# Altium PCB motherboard.pcbdoc
Units mil, origin at the board's own origin, x right, y up, seen from the top; angles counter-clockwise.
Board outline 10976.97 x 1870.5 mil, 2 copper layers (Top Layer, Bottom Layer); 62 components, 56 nets, 228 pads, 95 vias.
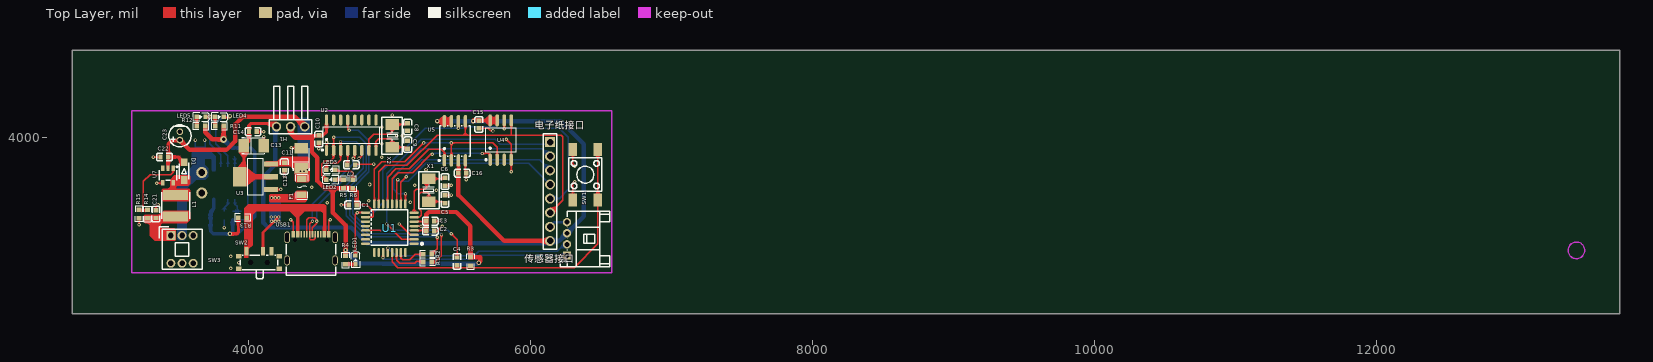
[diagram p0: Top Layer view]
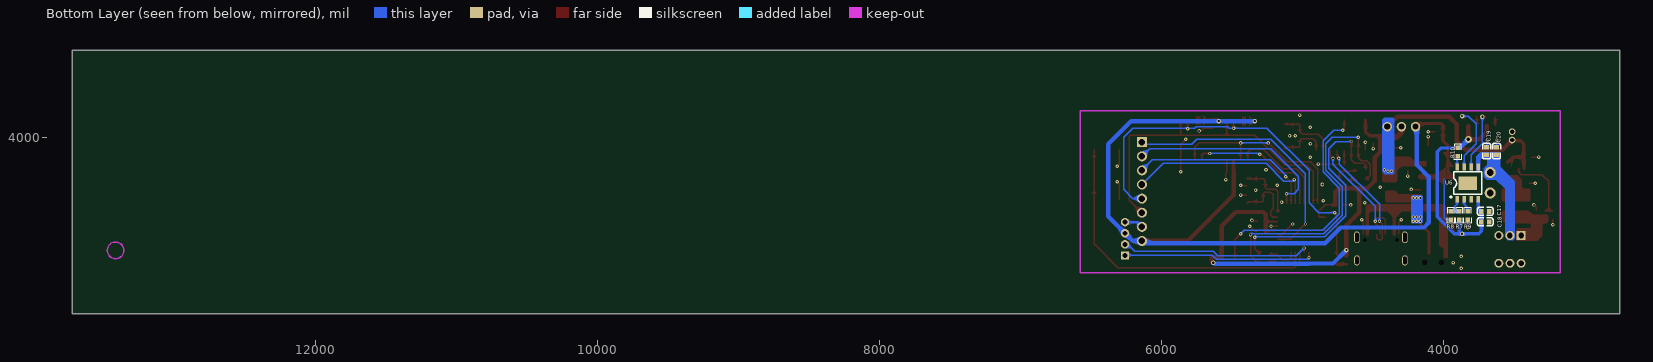
[diagram p1: Bottom Layer view, seen from below]

## Layer stack, top to bottom
Top Layer: signal copper (thickness not stored)
Dielectric: dielectric 12.6, FR-4, Dk 4.8
Bottom Layer: signal copper (thickness not stored)

## Board outline
13726.97,2750 2750,2750 2750,4620.5 13726.97,4620.5

## Components (designator, comment, footprint, x,y, rotation, side; value= is the part's Value field where it differs from the comment)
C1 "100nF" C0603 4740,3521.9 r0 top
C2 "100nF" C0603 5290,3336.9 r180 top
C3 "100nF" C0603 5290,3406.9 r180 top
C4 "100nF" C0603 5480,3121.9 r90 top
C5 "22PF" C0603 5395,3561.9 r90 top
C6 "22PF" C0603 5395,3686.9 r270 top
C7 "100nF" C0603 4730,3806.9 r180 top
C8 "22PF" C0603 5130,4074.34 r270 top
C9 "22PF" C0603 5130,3949.34 r90 top
C10 "100nF" C0603 4500,3989.46 r90 top
C11 "10uF" CAP-SMD_L3.5-W2.8-FD 4375,3851.9 r90 top
C12 "100nF" C0603 4255,3794.46 r90 top
C13 "10uF" CAP-SMD_L3.5-W2.8-FD 4040,3941.9 r0 top
C14 "100nF" C0603 4032.56,4041.9 r180 top
C15 "100nF" C0603 5635,4091.9 r270 top
C16 "100nF" C0603 5517.44,3746.9 r0 top
C17 "10UF" C0603 3705,3476.9 r180 bottom
C18 "1UF" C0603 3705,3401.9 r180 bottom
C19 "10UF" C0603 3695,3904.34 r90 bottom
C20 "1UF" C0603 3625,3904.34 r90 bottom
C21 "10UF" C0603 3345,3456.9 r90 top
C22 "1UF" C0603 3405,3861.9 r180 top
C23 "47uF" CAP-TH_BD4.0-P1.50-D0.8-FD 3515,4011.9 r90 top
D1 "1N4007W" SOD-123FL_L3.0-W1.8-LS3.7-RD 3545,3761.9 r270 top
F1 "500mA/24V" F1206 4380,3651.9 r90 top
H1 "2.54-1*3P正弯针" HDR-TH_3P-P2.54-H-M-BW7.2-P 4300,4076.9 r180 top
L1 "22uH" IND-SMD_L5.0-W5.0-P3.60_SMNR5040 3485,3516.9 r90 top
LED1 "D-060306R1/SS2/L" LED0603-RD 4760,3131.9 r270 top
LED2 "D-060306R1/SS2/L" LED0603-RD 4583.52,3701.76 r0 top
LED3 "D-060306R1/SS2/L" LED0603-RD 4585,3771.9 r0 top
LED4 "D-060306R1/SS2/L" LED0603-RD 3795,4146.9 r180 top
LED5 "D-060306R1/SS2/L" LED0603-RD 3665,4146.9 r180 top
R1 "1k" R0603 5270,3116.9 r180 top
R2 "1k" R0603 5270,3171.9 r180 top
R3 "10K" R0603 5575,3121.9 r270 top
R4 "10K" R0603 4690,3131.56 r270 top
R5 "10K" R0603 4675,3671.9 r90 top
R6 "10K" R0603 4740,3671.56 r90 top
R7 "NC" R0603 3890,3446.9 r90 bottom
R8 "NC" R0603 3950,3446.9 r90 bottom
R9 "2K" R0603 3830,3447.24 r90 bottom
R10 "0.5R" R0603 3900,3896.56 r90 bottom
R11 "10K" R0603 3795,4081.9 r0 top
R12 "10K" R0603 3665,4081.9 r0 top
R13 "0R" R0603 3959.66,3431.9 r180 top
R14 "10K" R0603 3285,3456.9 r270 top
R15 "NC" R0603 3225,3456.9 r90 top
SW1 "Key_SMD_6x6x6.5" SW-SMD_4P-L6.0-W6.0-P4.50-LS9.0-2 6390,3736.9 r90 top
SW2 "SSSS811101" SW-SMD_SSSS811101 4075,3131.9 r0 top
SW3 "XKB7070-Z" SW-TH_6P-L7.0-W7.0-P2.00 3530,3206.9 r90 top
U1 "EGA328p" QFP-32 5010,3356.9 r180 top
U2 "CH340G" SOIC-16_L9.9-W3.9-P1.27-LS6.0-BL 4730,4016.9 r0 top
U3 "REG1117A" SOT-223-4_L6.5-W3.5-P2.30-LS7.0-BR 4050,3721.9 r0 top
U4 "GT30L32S4W" SOP-8_L5.3-W5.3-P1.27-LS8.0-BL 5790,3981.9 r0 top
U5 "W25Q16JVSNIQ TR" SOIC-8_L5.2-W5.2-P1.27-LS7.9-BL 5465,3976.9 r0 top
U6 "TP4056" ESOP-8_L4.9-W3.9-P1.27-LS6.0-BL-EP 3830,3676.9 r180 bottom
U7 "ME2188C50M5G" SOT-23-5_L3.0-W1.7-P0.95-LS2.8-BR 3430,3731.9 r90 top
USB1 "TYPE-C16PIN" USB-C-SMD_TYPE-C16PIN 4445,3221.9 r0 top
X1 "RG16000494" CRYSTAL-SMD_L5.0-W3.2 5280,3626.9 r270 top
X2 "RG12000501" CRYSTAL-SMD_L5.0-W3.2 5020,4011.9 r90 top
传感器接口 "HX20018-4WA" CONN-TH_4P-P2.00_HX20018-4WA 6260,3281.9 r90 top
电子纸接口 "2.54-1*8P母环保" HDR-TH_8P-P2.54-V-F-1 6140,3616.9 r270 top

## Footprints (in the part's own frame and the unit in brackets; to place one, negate y for a bottom-side part, rotate by r counter-clockwise, add the part's x,y. Pads: shape width x height; smd on the part's side, far side on the other; paste and mask are expansions set on the pad)
C0603 [mm]
  rect 0.8x0.9 smd: 1(-0.7,0) 2(0.7,0)
  silkscreen extent -1.41,-0.71 1.39,0.72
CAP-SMD_L3.5-W2.8-FD [mil]
  rect 74.8x93.5 smd: 1(-70.8,0) 2(70.8,0)
  silkscreen extent -87,-61 72,61
CAP-TH_BD4.0-P1.50-D0.8-FD [mm]
  round 1.2 hole 0.8: 1(-0.75,0) 2(0.75,0)
  silkscreen extent -1.98,-2 2.06,2
CONN-TH_4P-P2.00_HX20018-4WA [mil]
  rect 59.1x59.1 hole 35.4: 1(-118.1,0)
  round 59.1 hole 35.4: 2(-39.4,0) 3(39.4,0) 4(118.1,0)
  silkscreen extent -197,-303 197,50
CRYSTAL-SMD_L5.0-W3.2 [mil]
  rect 74.8x94.5 smd: 1(-80.7,0) 2(80.7,0)
  silkscreen extent -131,-73 131,73
ESOP-8_L4.9-W3.9-P1.27-LS6.0-BL-EP [mm]
  rect 0.6x1.2 smd: 1(-1.905,-2.908) 2(-0.635,-2.908) 3(0.635,-2.908) 4(1.905,-2.908) 5(1.905,2.908) 6(0.635,2.908) 7(-0.635,2.908) 8(-1.905,2.908)
  rect 3.3x2.4 smd: 9(0,0)
  silkscreen extent -3.2,-2.67 2.55,2.05
F1206 [mil]
  rect 46.9x68 smd: 1(-56.9,0) 2(56.9,0)
  silkscreen extent -89,-43 89,43
HDR-TH_3P-P2.54-H-M-BW7.2-P [mil]
  round 66.9 hole 43.3: 1(-100,0) 2(0,0) 3(100,0)
  silkscreen extent -150,-286 150,50
HDR-TH_8P-P2.54-V-F-1 [mil]
  rect 70.9x70.9 hole 47.2: 1(-350,0)
  round 70.9 hole 47.2: 2(-250,0) 3(-150,0) 4(-50,0) 5(50,0) 6(150,0) 7(250,0) 8(350,0)
  silkscreen extent -410,-48 410,48
IND-SMD_L5.0-W5.0-P3.60_SMNR5040 [mil]
  rect 70.9x177.2 smd: 1(-76.8,0) 2(76.8,0)
  silkscreen extent -94,-98 94,98
LED0603-RD [mm]
  rect 0.8x0.8 smd: 1(-0.799,-0.003) 2(0.799,0.003)
  silkscreen extent -1.49,-0.75 1.39,0.76
QFP-32 [mil]
  oval 65x17.7 smd: 1(-166.25,110.4) 2(-166.25,78.9) 3(-166.25,47.4) 4(-166.25,15.9) 5(-166.25,-15.6) 6(-166.25,-47.1) 7(-166.25,-78.6) 8(-166.25,-110.1) 17(178.75,-110.1) 18(178.75,-78.6) 19(178.75,-47.1) 20(178.75,-15.6) 21(178.75,15.9) 22(178.75,47.4) 23(178.75,78.9) 24(178.75,110.4)
  oval 17.7x65 smd: 9(-103.95,-171.9) 10(-72.45,-171.9) 11(-40.95,-171.9) 12(-9.45,-171.9) 13(22.05,-171.9) 14(53.55,-171.9) 15(85.05,-171.9) 16(116.55,-171.9) 25(116.55,172.1) 26(85.05,172.1) 27(53.55,172.1) 28(22.05,172.1) 29(-9.45,172.1) 30(-40.95,172.1) 31(-72.45,172.1) 32(-103.95,172.1)
  silkscreen extent -234,-130 139,123
R0603 [mil]
  rect 31.75x34.02 smd: 1(-29.66,0) 2(29.66,0)
  silkscreen extent -55,-26 55,26
SOD-123FL_L3.0-W1.8-LS3.7-RD [mil]
  rect 55.1x48 smd: 1(-63,0) 2(63,0)
  silkscreen extent -59,-34 59,34
SOIC-8_L5.2-W5.2-P1.27-LS7.9-BL [mm]
  oval 0.63x2.25 smd: 1(-1.905,-3.53) 2(-0.635,-3.53) 3(0.635,-3.53) 4(1.905,-3.53) 5(1.905,3.53) 6(0.635,3.53) 7(-0.635,3.53) 8(-1.905,3.53)
  silkscreen extent -2.99,-3.69 2.74,2.75
SOIC-16_L9.9-W3.9-P1.27-LS6.0-BL [mil]
  oval 23.7x77.6 smd: 1(-175,-107.7) 2(-125,-107.7) 3(-75,-107.7) 4(-25,-107.7) 5(25,-107.7) 6(75,-107.7) 7(125,-107.7) 8(175,-107.7) 9(175,107.7) 10(125,107.7) 11(75,107.7) 12(25,107.7) 13(-25,107.7) 14(-75,107.7) 15(-125,107.7) 16(-175,107.7)
  silkscreen extent -211,-111 198,60
SOP-8_L5.3-W5.3-P1.27-LS8.0-BL [mil]
  oval 23.98x86.79 smd: 1(-75,-139.46) 2(-25,-139.46) 3(25,-139.46) 4(75,-139.46) 5(75,139.46) 6(25,139.46) 7(-25,139.46) 8(-75,139.46)
  silkscreen extent -111,-145 106,87
SOT-23-5_L3.0-W1.7-P0.95-LS2.8-BR [mm]
  rect 1x0.6 smd: 1(1.3,-0.95) 2(1.3,0) 3(1.3,0.95) 4(-1.3,0.95) 5(-1.3,-0.95)
  silkscreen extent -0.9,-1.78 1.65,1.55
SOT-223-4_L6.5-W3.5-P2.30-LS7.0-BR [mm]
  rect 2.47x0.98 smd: 1(2.835,-2.3) 2(2.835,0) 3(2.835,2.3)
  rect 2.47x3.6 smd: 4(-2.835,0)
  silkscreen extent -1.37,-3.33 1.37,3.33
SW-SMD_4P-L6.0-W6.0-P4.50-LS9.0-2 [mm]
  rect 2.3x1.5 smd: 1(-4.55,2.25) 2(4.55,2.25) 3(-4.55,-2.25) 4(4.55,-2.25)
  silkscreen extent -3,-3 3,3
SW-SMD_SSSS811101 [mil]
  rect 27.6x59.1 smd: 1(-88.6,61) 2(29.5,61) 3(88.6,61)
  rect 39.4x31.5 smd: 4(-143.7,25.6) 5(143.7,25.6) 6(143.7,-61) 7(-143.7,-61)
  Multi-Layer board cut-out: -41.3,-17.7 -43.05,-10.02 -47.96,-3.86 -55.06,-0.44 -62.94,-0.44 -70.04,-3.86 -74.95,-10.02 -76.7,-17.7 -76.7,-17.7 -74.95,-25.38 -70.04,-31.54 -62.94,-34.96 -55.06,-34.96 -47.96,-31.54 -43.05,-25.38 -41.3,-17.7
  Multi-Layer board cut-out: 76.8,-17.7 75.05,-10.02 70.14,-3.86 63.04,-0.44 55.16,-0.44 48.06,-3.86 43.15,-10.02 41.4,-17.7 41.4,-17.7 43.15,-25.38 48.06,-31.54 55.16,-34.96 63.04,-34.96 70.14,-31.54 75.05,-25.38 76.8,-17.7
  silkscreen extent -134,-132 134,34
SW-TH_6P-L7.0-W7.0-P2.00 [mm]
  rect 1.6x1.6 hole 1: 1(2.5,2)
  round 1.6 hole 1: 2(2.5,0) 3(2.5,-2) 4(-2.5,2) 5(-2.5,0) 6(-2.5,-2)
  silkscreen extent -3.6,-3.6 4.06,4.06
USB-C-SMD_TYPE-C16PIN [mil]
  oval 39.4x82.7 hole 23.6 slot 66.9 at 90 deg: 1(-170.1,70.4) 2(170.1,70.4)
  oval 39.4x70.9 hole 23.6 slot 55.1 at 90 deg: 3(-170.1,-93) 4(170.1,-93)
  rect 23.6x45.3 smd: A1B12(-126,93) A4B9(-94.5,93) B1A12(126,93) B4A9(94.5,93)
  rect 11.8x45.3 smd: A5(-49.2,93) A6(-9.8,93) A7(9.8,93) A8(-68.9,93) B5(68.9,93) B6(29.5,93) B7(-29.5,93) B8(49.2,93)
  Multi-Layer board cut-out: 126.6,50.7 125.33,56.25 121.78,60.71 116.65,63.18 110.95,63.18 105.82,60.71 102.27,56.25 101,50.7 101,50.7 102.27,45.15 105.82,40.69 110.95,38.22 116.65,38.22 121.78,40.69 125.33,45.15 126.6,50.7
  Multi-Layer board cut-out: -101,50.7 -102.27,56.25 -105.82,60.71 -110.95,63.18 -116.65,63.18 -121.78,60.71 -125.33,56.25 -126.6,50.7 -126.6,50.7 -125.33,45.15 -121.78,40.69 -116.65,38.22 -110.95,38.22 -105.82,40.69 -102.27,45.15 -101,50.7
  silkscreen extent -175,-197 175,20

## Free pads (board coordinates)
  round 78.74 hole 47.24: 1(3670,3606.9) 2(3670,3751.9)

## Via types
v1: diameter 25, hole 12, Top Layer to Bottom Layer, 45 vias
v2: diameter 24.02, hole 12.01, Top Layer to Bottom Layer, 42 vias
v3: diameter 32, hole 16, Top Layer to Bottom Layer, 7 vias
v4: diameter 50, hole 25, Top Layer to Bottom Layer, 1 vias

## Nets (pads, with @x,y where several pads share a name; then routed paths per layer and width w, separated by ;. In a path a pad name is that pad's centre, name@x,y a point inside that pad or via, vN(x,y) a via of type N, cw(c..) or ccw(c..) an arc to the next point about the centre after c; other vN are vias at no path point)
3.3V: C13.1 C14.2 C15.1 C16.1 H1.3 U3.2 U3.4 U4.7 U4.8 U5.3 U5.7 U5.8 传感器接口.3 电子纸接口.8 | length 6907.7
  Top Layer w19.68: v3(5340,4116.9) 5341.02,4115.88 U5.8 U5.7 ; C16.1 5490,3747.02 U5.3 ; C15.1 5636.9,4121.36 U4.8 U4.7
  Top Layer w23.62: U3.4 3969.2,3752.71 C13.1 4005,3977.7 C14.2 4005,4086.9 4017.44,4099.34 4177.56,4099.34 H1.3
  Top Layer w31.5: C16.1@5490,3747.02 5490,3591.9 5815,3266.9 电子纸接口.8 ; v3(5595,4116.9) 5599.46,4121.36 C15.1@5636.9,4121.36
  Top Layer w39.37: U3.4 U3.2
  Bottom Layer w31.5: H1.3 4190,4066.9 4190,3805.65 4105,3720.65 4105,3396.9 4140,3361.9 4729.82,3361.9 4839.82,3251.9 6149.85,3251.9 电子纸接口.8@6164.85,3266.9 ; v3(5340,4116.9) v3(5595,4116.9) 6215,4116.9 6380,3951.9 6380,3441.3 传感器接口.3 6205.6,3266.9 电子纸接口.8@6164.85,3266.9 ; 电子纸接口.8 电子纸接口.8@6164.85,3266.9
$1N2861: LED1.2 R4.2 | length 70.7
  Top Layer w19.68: R4.2 4758.66,3101.9 LED1.2
$1N3574: C7.2 U2.4 | length 103.4
  Top Layer w10: C7.2 4705,3809.46 U2.4
$1N4007: C8.1 U2.7 X2.2 | length 430
  Top Layer w10: U2.7 4855,3986.9 4890,4021.9 5000,4021.9 5020,4041.9 X2.2 5120.7,4092.6 C8.1
$1N4032: C9.1 U2.8 X2.1 | length 354.7
  Top Layer w10: U2.8 4905,3971.9 4925,3991.9 5010,3991.9 5020,3981.9 X2.1 5120.58,3931.2 C9.1
$1N4612: LED2.2 R5.2 | length 60.3
  Top Layer w10: LED2.2 R5.2@4675.34,3701.9
$1N4844: LED3.2 R6.2 | length 182.5
  Top Layer w10: LED3.2 4626.61,3761.9 4730,3761.9 4740,3751.9 R6.2
$1N6641: F1.1 SW2.2 | length 535.6
  Top Layer w19.68: SW2.2@4104.5,3177.9 4104.5,3326.4 v2(4215,3436.9) ; v2(4165,3571.9) v2(4190,3571.9) v2(4215,3571.9) 4341.9,3571.9 F1.1@4380,3610
  other v2: 4165,3406.9 4190,3406.9 4215,3406.9 4162.77,3436.9 4190,3436.9
$1N15331: R9.2 U6.2 | length 95.9
  Bottom Layer w10: R9.2 3830,3501.9 3855,3526.9 U6.2
$1N16926: R10.1 U6.8 | length 77.6
  Bottom Layer w10: R10.1 3905,3861.9 U6.8
$1N17723: LED4.2 R11.1 | length 65.6
  Top Layer w10: LED4.2 3765.34,4144.95 R11.1
$1N17812: LED5.2 R12.1 | length 65.6
  Top Layer w10: LED5.2 3635.34,4144.95 R12.1
$1N17901: LED4.1 U6.7 | length 492.6
  Top Layer w10: 3845,4141.9 3860,4141.9 v3(3870,4151.9)
  Bottom Layer w10: U6.7 3855,3871.9 3770,3956.9 3770,4096.9 3825,4151.9 v3(3870,4151.9)
$1N17990: LED5.1 U6.6 | length 417.2
  Top Layer w10: LED5.1 3724.86,4147.03 v3(3725,4146.9)
  Bottom Layer w10: v3(3725,4146.9) 3725,3956.9 3805,3876.9 U6.6
$1N22837: C21.1 L1.1 R14.2 SW3.1 | length 419.7
  Top Layer w31.5: R14.2@3289.66,3426.9 3342.56,3426.9 C21.1 ; SW3.1 3371.59,3305.32 3345,3331.9 C21.1 ; L1.1@3485,3450.1 3464.24,3429.34 C21.1
$1N23850: D1.2 L1.2 U7.5 | length 85.1
  Top Layer w23.62: U7.5 3526.82,3680.72 D1.2
+5V: C11.1 C12.2 C22.1 C23.1 D1.1 F1.2 H1.1 U3.3 U7.2 | length 1818.1
  Top Layer w19.68: U3.3@4156.61,3817.45 4371.35,3817.45 4370,3816.1 v2(4370,3761.9) 4370,3733.8 F1.2@4380,3723.8
  Top Layer w23.62: U7.2 3430,3859.34 C22.1 ; C23.1 3509.44,3976.81 3454.91,3976.81 3432.56,3954.46 C22.1 ; D1.1 3508,3861.9 C22.1
  Top Layer w31.5: C23.1 3585.47,3911.9 3845,3911.9 3906.05,3972.95 3906.05,4092.95 3960,4146.9 4330,4146.9 H1.1
  other v2: 4395,3761.9 4420,3771.9
AD0: U1.23
AD1: U1.24
AD2: U1.25
AD3: U1.26
AD6: U1.19
AD7: U1.22
AREF: U1.20
BAT: C19.1 C20.1 pad.2 SW3.2 U6.5 | length 861.6
  Bottom Layer w23.62: C20.1 3658.02,3876.78 ; pad.2 3658.02,3763.88 3658.02,3876.78 ; U6.5 3755,3856.9 3735.12,3876.78 C19.1 3658.02,3876.78
  Bottom Layer w39.37: SW3.2 3530,3651.9 3630,3751.9 pad.2
D+: U2.5 USB1.A6 USB1.B6 | length 833.9
  Top Layer w10: v2(4455,3406.9) 4435.2,3387.1 USB1.A6 4435,3314.7 4435,3281.9 4440,3276.9 4465,3276.9 4474.5,3286.4 USB1.B6 ; v2(4745,3851.9) 4755,3861.9 U2.5
  Bottom Layer w10: v2(4455,3406.9) 4455,3526.9 4740,3811.9 4740,3846.9 v2(4745,3851.9)
D-: U2.6 USB1.A7 USB1.B7 | length 933.6
  Top Layer w10: USB1.B7 4415.5,3417.4 4430,3431.9 4470,3431.9 4485,3416.9 v2(4485,3406.9) 4485,3391.9 4454.8,3361.7 USB1.A7 ; v2(4785,3851.9) 4805,3871.9 U2.6
  Bottom Layer w10: v2(4485,3406.9) 4485,3511.9 4785,3811.9 v2(4785,3851.9)
  other v2: 4485,3406.9
DTR: C4.2 U2.13 | length 1756.6
  Top Layer w10: U2.13 4705,4061.9 v2(4715,4051.9) ; v2(5440,3316.9) 5480,3276.9 C4.2
  Bottom Layer w10: v2(4715,4051.9) 4780,4051.9 4855,3976.9 4855,3756.9 4740,3641.9 4740,3458.47 4856.57,3341.9 5415,3341.9 v2(5440,3316.9)
  other v2: 5440,3316.9 4715,4051.9 4715,4051.9
EN: R14.1 R15.2 U7.1 | length 533.7
  Top Layer w10: R15.2@3225,3481.56 3256.74,3481.56 ; R14.1@3285,3481.56 3256.74,3481.56 ; U7.1 3467.4,3754.3 3450,3736.9 3305,3736.9 3256.74,3688.64 3256.74,3481.56
GND: C1.1 C2.1 C3.1 C5.2 C6.2 C7.1 C8.2 C9.2 C10.1 C11.2 C12.1 C13.2 C14.1 C15.2 C16.2 C17.2 C18.2 C19.2 C20.2 C21.2 C22.2 C23.2 pad.1 R8.1 R9.1 R15.1 SW1.1 SW1.2 SW2.4 SW2.5 SW2.6 SW2.7 U1.3 U1.5 U1.21 U2.1 U3.1 U4.4 U5.4 U6.3 U6.9 U7.4 USB1.1 USB1.2 USB1.3 USB1.4 USB1.A1B12 USB1.B1A12 传感器接口.4 电子纸接口.7 | length 2921.6
  Top Layer w10: v1(3225,3381.9) R15.1@3225,3422.24 ; v1(3325,3861.9) C22.2 ; C21.2 3345,3506.9 v1(3360,3521.9) ; v1(3350,3676.9) 3388.78,3676.9 U7.4 ; C14.1 v1(4110,4041.9) ; v1(4110,4006.9) 4110.8,4006.1 C13.2 ; U3.1 4229.45,3631.35 v1(4230,3631.9) ; v1(4255,3726.9) C12.1 ; v1(4300,3416.9) 4319,3397.9 USB1.A1B12 ; v1(4305,3926.9) 4370.8,3926.9 C11.2 ; v1(4500,3921.9) C10.1 ; U2.1 v1(4555,3966.9) ; USB1.B1A12 4571,3407.9 v1(4580,3416.9) ; v1(4660,3521.9) C1.1 ; C7.1 4762.56,3811.9 v1(4890,3811.9) ; U1.21 4935.9,3341 4940,3336.9 ; v2(5070,3386.9) 5147.4,3309.5 U1.3 ; U1.5 5224.4,3372.5 v2(5225,3371.9) ; C2.1 5340,3336.9 v1(5375,3371.9) ; C3.1 5355,3406.9 v1(5360,3411.9) ; C5.2 5437.56,3589.46 v1(5440,3591.9) ; C6.2 5437.44,3659.34 v1(5440,3661.9) ; U5.4 5540,3751.9 C16.2 v1(5545,3701.9) ; C15.2 5702.45,4064.34 5719.89,4046.9 v1(5735,4046.9) ; v1(5830,3986.9) 5865,3951.9 U4.4 v1(5865,3756.9) ; SW1.1 6301.41,3673.32 v1(6315,3686.9) ; SW1.2 6301.43,3810.47 v1(6315,3796.9)
  Bottom Layer w10: v1(3625,3981.9) C20.2 C19.2 3695,3976.9 v1(3690,3981.9) ; v1(3830,3361.9) R9.1 ; R8.1 3980.34,3417.24 3995,3431.9 3995,3701.9 4000,3706.9
  Bottom Layer w19.68: 电子纸接口.7 6173.1,3400 传感器接口.4
  other v1: 3875,3071.53 3931.3,3113.55 3875,3156.9 4560,3536.9 5150,3541.9 4855,3551.9 5333.88,3626.9 4450,3646.9 5180,3661.9 4860,3666.9 5260,3771.9 4947.2,3860.88 4945,3956.9 5092.8,4011.9 5052.31,4012.6 4947.2,4073.36 5020,4159.71
IO0: R1.2 U1.30 | length 261.5
  Top Layer w10: U1.30 5050.95,3130.95 5075,3106.9 5180,3106.9 5195,3121.9 5235.34,3121.9 R1.2
IO1: R2.2 U1.31 | length 220
  Top Layer w10: U1.31 5082.45,3144.45 5095,3131.9 5145,3131.9 5185,3171.9 R2.2
IO2: U1.32
IO3: U1.1
IO4: U1.2 电子纸接口.1 | length 1878.6
  Top Layer w10: v2(4980,3386.9) 5088.9,3278 U1.2
  Bottom Layer w10: v2(4980,3386.9) 4980,3741.9 5225,3986.9 5750,3986.9 5785,3951.9 6125,3951.9 电子纸接口.1
IO5: U1.9 电子纸接口.2 | length 1481.6
  Top Layer w10: U1.9 5113.95,3602.95 v2(5115,3601.9)
  Bottom Layer w10: v2(5115,3601.9) 5060,3601.9 5030,3631.9 5030,3726.9 5225,3921.9 6085,3921.9 电子纸接口.2
IO6: U1.10 电子纸接口.3 | length 1315.3
  Top Layer w10: U1.10 5082.45,3684.35 v2(5120,3721.9)
  Bottom Layer w10: v2(5120,3721.9) 5120,3731.9 5230,3841.9 6065,3841.9 电子纸接口.3
IO7: U1.11 电子纸接口.4 | length 1375.6
  Top Layer w10: U1.11 5050.95,3692.85 v2(5060,3701.9)
  Bottom Layer w10: v2(5060,3701.9) 5070.84,3691.06 5132.5,3691.06 5258.34,3816.9 5990,3816.9 电子纸接口.4
IO8: U1.12 U4.1 | length 986.5
  Top Layer w10: U1.12 5019.45,3706.35 5065,3751.9 5165,3751.9 5295,3881.9 v2(5305,3881.9) ; v2(5660,3886.9) 5705,3886.9 5715,3876.9 U4.1
  Bottom Layer w10: v2(5305,3881.9) 5310,3886.9 v2(5660,3886.9)
IO9: U1.13 U5.1 | length 742
  Top Layer w10: U1.13 4987.95,3719.85 5045,3776.9 5140,3776.9 5280,3916.9 5370,3916.9 5390,3896.9 U5.1
IO10: U1.14
MISO: U1.16 U4.2 U5.2 | length 1421.2
  Top Layer w10: U1.16 4893.45,3775.35 4945,3826.9 5110,3826.9 v2(5245,3961.9) ; U5.2 v2(5440,3961.9) 5735,3961.9 5765,3931.9 U4.2
  Bottom Layer w10: v2(5245,3961.9) v2(5440,3961.9)
MOSI: U1.15 U4.5 U5.5 电子纸接口.6 | length 2470.9
  Top Layer w10: U1.15 4924.95,3756.85 4970,3801.9 5125,3801.9 5340,4016.9 5524.87,4016.9 ; U5.5 5540,4032.03 ; U4.5 5865,4021.9 5860,4016.9 ; 电子纸接口.6 6230,3556.9 6230,4006.9 6219.55,4017.35 6098.34,4017.35 6097.89,4016.9 5860,4016.9 ; 5524.87,4016.9 5540,4032.03 ; 5524.87,4016.9 5539.76,4016.9 ; 5539.76,4016.9 5540,4017.14 5540,4032.03 ; 5539.76,4016.9 5554.87,4016.9 ; 5540,4032.03 5554.87,4017.16 5554.87,4016.9 ; 5554.87,4016.9 5860,4016.9
NTC: R7.2 R8.2 U6.1 | length 152.2
  Bottom Layer w10: R7.2 3920.37,3476.56 ; U6.1 3905,3526.9 3920.37,3511.53 3920.37,3476.56 ; R8.2 3920.37,3476.56
RESET: C4.1 R3.2 SW1.3 SW1.4 U1.29 | length 2283.7
  Top Layer w10: U1.29 5019.45,3117.45 5060,3076.9 6310,3076.9 6478.59,3245.49 SW1.3 SW1.4
RXD: LED2.1 R1.1 U2.2 | length 2119.9
  Top Layer w10: LED2.1 4520.76,3732.92 4520.76,3811.95 4545.71,3836.9 4585,3836.9 4605,3856.9 U2.2 4605,4001.06 v2(4605.84,4001.9) ; R1.1 5325,3116.9 5370,3161.9 v2(5370,3311.9)
  Bottom Layer w10: v2(4605.84,4001.9) 4790,4001.9 4835,3956.9 4835,3766.9 4720,3651.9 4720,3450.18 4851.28,3318.91 5362.99,3318.91 v2(5370,3311.9)
  other v2: 5370,3311.9
SCL: U1.28 传感器接口.2 | length 1359.7
  Top Layer w10: U1.28 4987.95,3214.85 v2(4990,3216.9)
  Bottom Layer w10: v2(4990,3216.9) 5045.75,3161.15 5602.74,3161.15 5633.48,3191.9 6190,3191.9 6240.6,3242.5 传感器接口.2
SCLK: LED1.1 U1.17 U4.6 U5.6 电子纸接口.5 | length 2921.7
  Top Layer w10: LED1.1 4759.86,3453.49 v2(4773.38,3467) U1.17 ; v2(5490,4066.9) U5.6 ; v2(5815,4061.9) U4.6
  Bottom Layer w10: v2(4773.38,3467) 4885.1,3467 4955,3536.9 4955,3766.9 5255,4066.9 v2(5490,4066.9) 5521.59,4066.9 5531.59,4076.9 5755,4076.9 5765,4066.9 5810,4066.9 v2(5815,4061.9) 5820,4066.9 6205,4066.9 6270,4001.9 6270,3631.9 6205,3566.9 电子纸接口.5
SDA: U1.27 传感器接口.1 | length 1361.4
  Top Layer w10: v2(4955,3146.9) 4956.45,3148.35 U1.27
  Bottom Layer w10: v2(4955,3146.9) 4965,3136.9 5610,3136.9 5640,3166.9 6256.9,3166.9 传感器接口.1
TXD: LED3.1 R2.1 U2.3 | length 1833.8
  Top Layer w10: LED3.1 4553.52,3805.43 4565,3816.9 4630,3816.9 4655,3841.9 U2.3 4655,3970.33 v2(4653.43,3971.9) ; R2.1 5340,3212.24 v2(5340,3291.9)
  Bottom Layer w10: v2(4653.43,3971.9) 4765,3971.9 4815,3921.9 4815,3781.9 4695,3661.9 4695,3446.9 4845,3296.9 5335,3296.9 v2(5340,3291.9)
VBUS: R13.1 SW2.1 USB1.A4B9 USB1.B4A9 | length 1252.4
  Top Layer w19.68: SW2.1@3986.4,3177.9 3986.4,3438.3 4055,3506.9 4326.57,3506.9 ; USB1.A4B9@4350.5,3329.9 4350.5,3482.97 ; USB1.B4A9@4539.5,3329.9 4539.5,3487.4 4520,3506.9 4374.43,3506.9 ; 4326.57,3506.9 4350.5,3482.97 ; 4326.57,3506.9 4349.98,3506.9 ; 4349.98,3506.9 4350.5,3506.38 4350.5,3482.97 ; 4349.98,3506.9 4374.43,3506.9 ; 4350.5,3482.97 4374.43,3506.9
VCC: C1.2 C2.2 C3.2 C10.2 H1.2 R3.1 R4.1 R5.1 R6.1 U1.4 U1.6 U1.18 U2.16 | length 3940.4
  Top Layer w10: C1.2 4840,3521.9 4885,3476.9 4885,3441.9 4878.6,3435.5 U1.18 ; U1.4 5258.34,3341 C2.2 ; U1.6 5259.54,3404 C3.2
  Top Layer w23.62: 4441.54,4011.9 4525,4011.9 4555,4041.9 U2.16
  Top Layer w31.5: 4451.54,4001.9 4451.54,3895.36 4490,3856.9 4490,3691.9 4540,3641.9 4570.99,3641.9 ; R4.1 v3(4690,3201.66) 4690,3376.9 4600,3466.9 4600,3612.89 4597.9,3614.99 ; C1.2 4767.56,3614.34 R6.1 4624.82,3641.9 ; C2.2 5262.76,3337.22 5262.76,3387.54 5262.44,3387.86 C3.2 5262.44,3454.34 5280,3471.9 5475,3471.9 5575,3371.9 R3.1 5645,3151.56 5645,3121.9 v3(5635,3111.9) ; 4570.99,3641.9 4597.9,3614.99 ; 4570.99,3641.9 4597.9,3641.9 ; 4597.9,3614.99 4624.82,3641.9 ; 4597.9,3614.99 4597.9,3641.9 ; 4597.9,3641.9 4624.82,3641.9
  Top Layer w39.37: H1.2 4300,4036.9 4335,4001.9 4451.54,4001.9
  Bottom Layer w31.5: v3(4690,3201.66) 4784.76,3106.9 4951.5,3106.9 4952.26,3106.14 5622.74,3106.14 5623.5,3106.9 5630,3106.9 v3(5635,3111.9)
VCC1: C17.1 C18.1 R7.1 R10.2 R11.2 R12.2 R13.2 U6.4 | length 1890.9
  Top Layer w23.62: v3(3870,3316.9) 3920,3316.9 3930,3326.9 R13.2
  Top Layer w31.5: R12.2 3694.66,4037.24 3745,3986.9 3826.03,3986.9 3825,3987.93 3825,4081.56 R11.2
  Bottom Layer w23.62: U6.4 3755,3499.34 C17.1 C18.1 3732.56,3334.34 3750,3316.9 v3@3880,3316.9 ; R7.1 3890,3326.9 v3@3880,3316.9 ; R10.2 4017.02,3926.22 4045,3898.24 4045,3436.9 3925,3316.9 v3@3880,3316.9
  Bottom Layer w31.5: v4(3825,3986.9) 3885.68,3926.22 R10.2
XTAL1: C5.1 U1.7 X1.2 | length 468.3
  Top Layer w10: U1.7 5213.6,3435.5 5228.16,3450.06 5228.16,3478.74 5210,3496.9 5210,3596.9 5225,3611.9 5270,3611.9 5280,3601.9 X1.2 5383.14,3546.2 C5.1
XTAL2: C6.1 U1.8 X1.1 | length 436.6
  Top Layer w10: U1.8 5176.25,3618.15 5190,3631.9 5250,3631.9 5265,3646.9 5265,3692.6 X1.1 5388.14,3707.6 C6.1
"": SW2.3 SW3.3 SW3.4 SW3.5 SW3.6 U2.9 U2.10 U2.11 U2.12 U2.14 U2.15 U4.3 U7.3 USB1.A5 USB1.A8 USB1.B5 USB1.B8

## Polygon pours and split planes (outlines as drawn)
GND on Top Layer (solid, remove dead copper, pour order 0): 3135,3041.9 6760,3041.9 6760,4211.9 3135,4211.9
GND on Bottom Layer (solid, remove dead copper, pour order 1): 3000,3011.9 6810,3011.9 6810,4326.9 3000,4326.9

## Keep-outs
Board Outline Layer:
  circle w10 net "": c13417.91,3200.01 r59.06
  lines w10 net "": 3175,3041.9 6578.15,3041.9 6578.15,4191.51 3175,4191.51 3175,3041.9

## Other copper
Top Layer:
  region net VBUS: 4000,3146.9 4000,3206.9 4030,3236.9 4030,3451.9 4055,3476.9 4295,3476.9 4340,3431.9 4340,3308.6 4338.7,3307.3 4362.3,3307.3 4362.3,3439.2 4400,3476.9 4515,3476.9 4530,3461.9 4530,3306.9 4551.3,3307.3 4551.3,3516.41 4539.5,3528.21 4001.31,3528.21 3970,3496.9 3970,3146.9
  region net +5V: 4125,3831.9 4205,3831.9 4237.2,3864.1 4422.8,3864.1 4435,3851.9 4435,3691.9 4425,3681.9 4340,3681.9 4330,3691.9 4330,3766.9 4298.97,3797.93 4124.04,3797.93
  region net $1N22837: 3258.99,3402.91 3270,3391.9 3285,3391.9 3300,3376.9 3300,3301.9 3335,3266.9 3480,3266.9 3485,3271.9 3485,3346.9 3475,3356.9 3390,3356.9 3380,3366.9 3380,3381.9 3390,3391.9 3565,3391.9 3590,3416.9 3590,3468.91 3577.01,3481.9 3400,3481.9 3370,3451.9 3265,3451.9 3258.99,3445.89
  region net $1N23850: 3386.6,3631.32 3386.6,3555.3 3395,3546.9 3583.11,3546.9 3590,3553.79 3590,3627.91 3581.01,3636.9 3495,3636.9 3490,3641.9 3490,3651.9 3495,3656.9 3575,3656.9 3590,3671.9 3590,3726.9 3585,3731.9 3475,3731.9 3445,3701.9 3445,3651.9 3430,3636.9 3392.18,3636.9
  region net $1N6641: 4150,3591.9 4150,3546.9 4155,3541.9 4405,3541.9 4415,3551.9 4415,3616.9 4410,3621.9 4343.5,3621.9 4318.5,3596.9 4155,3596.9
  region net VCC: 4798.31,3516.9 4798.31,3526.9 4783.31,3539.4 4783.31,3504.4
  region net VCC: 5231.69,3346 5231.69,3336 5246.69,3323.5 5246.69,3354.62
  region net VCC: 5231.69,3409 5231.69,3399 5246.69,3389.18 5246.69,3421.5
  region net IO0: 5209.46,3126.9 5209.46,3116.9 5224.46,3104.4 5224.46,3133.91
  region net RXD: 5325,3121.9 5315.54,3133.91 5315.54,3099.89 5325,3111.9
  region net IO1: 5209.46,3176.9 5209.46,3166.9 5224.46,3154.89 5224.46,3188.91
  region net TXD: 5326.14,3191.31 5320.2,3199.51 5291.92,3188.91 5315.54,3163.03
  region net RESET: 6473.59,3618.05 6461.09,3603.05 6496.09,3603.05 6483.59,3618.05
  region net RESET: 6473.59,3855.75 6483.59,3855.75 6496.09,3870.75 6461.09,3870.75
  region net VCC: 5590.75,3214.68 5559.25,3214.68 5557.99,3167.44 5592.01,3167.44
  region net DTR: 5485,3180.21 5475,3180.21 5462.5,3165.21 5497.5,3165.21
  region net XTAL2: 5362.28,3712.6 5362.28,3702.6 5377.28,3698.71 5377.28,3725.1
  region net $1N2861: 4714.86,3111.74 4714.86,3092.06 4744.39,3084.68 4744.39,3116.17
  region net SCLK: 4754.86,3194.12 4744.12,3179.12 4775.61,3179.12 4764.86,3194.12
  region net $1N2861: 4736.54,3111.74 4707.01,3117.78 4707.01,3086.02 4736.54,3092.06
  region net VCC: 4674.25,3201.66 4672.99,3177.1 4707.01,3177.1 4705.75,3201.66
  region net RXD: 4600,3856.9 4610,3856.9 4616.85,3882.25 4593.15,3882.25
  region net RXD: 4600,3961.89 4593.15,3936.15 4616.85,3936.15 4610,3961.89
  region net TXD: 4650,3856.51 4660,3856.51 4666.85,3882.25 4643.15,3882.25
  region net TXD: 4650,3961.89 4643.15,3936.15 4666.85,3936.15 4660,3961.89
  region net $1N3574: 4710,3856.51 4716.85,3882.25 4693.15,3882.25 4700,3856.51
  region net D+: 4760,3861.9 4766.85,3882.25 4743.15,3882.25 4750,3861.9
  region net $1N4007: 4850,3961.89 4843.15,3936.15 4866.85,3936.15 4860,3961.89
  region net $1N4032: 4900,3961.89 4893.15,3936.15 4916.85,3936.15 4910,3961.89
  region net VCC: 4543.19,4061.25 4566.81,4061.25 4566.85,4097.65 4543.15,4097.65
  region net DTR: 4710,4071.91 4716.85,4097.65 4693.15,4097.65 4700,4071.91
  region net $1N3574: 4710,3839.62 4700,3839.62 4687.5,3824.62 4718.19,3824.62
  region net $1N4007: 5015,4041.9 5025,4041.9 5037.5,4055.2 5002.5,4055.2
  region net $1N4007: 5082.25,4097.6 5067.25,4110.1 5067.25,4075.1 5082.25,4087.6
  region net $1N4032: 5082.25,3936.2 5067.25,3948.7 5067.25,3913.7 5082.25,3926.2
  region net $1N4032: 5025,3981.9 5015,3981.9 5002.5,3968.6 5037.5,3968.6
  region net $1N4007: 5097.28,4097.6 5097.28,4087.6 5112.28,4086.15 5112.28,4110.1
  region net $1N4032: 5097.28,3936.2 5097.28,3926.2 5112.28,3913.7 5112.28,3937.53
  region net $1N4612: 4645.75,3706.9 4630.75,3717.65 4630.75,3686.15 4645.75,3696.9
  region net RXD: 4525.7,3720.91 4536.3,3692.63 4561.05,3717.38 4532.77,3727.98
  region net $1N4612: 4642.99,3706.9 4642.99,3696.9 4657.99,3685.68 4657.99,3717.44
  region net $1N4844: 4647.22,3766.9 4632.22,3779.4 4632.22,3756.29 4647.22,3756.9
  region net TXD: 4548.52,3802.51 4537.78,3787.51 4569.27,3787.51 4558.52,3802.51
  region net $1N4844: 4745,3732.1 4735,3732.1 4722.99,3717.1 4757.01,3717.1
  region net VCC: 4756.42,3603.2 4778.7,3625.48 4757.01,3626.02 4722.99,3626.02
  region net VBUS: 4340.66,3367.08 4338.7,3337.55 4362.3,3337.55 4360.34,3367.08
  region net VBUS: 4549.34,3367.08 4529.66,3367.08 4527.7,3337.55 4551.3,3337.55
  region net $1N6641: 4348.86,3564.94 4390.27,3571.55 4346,3618.45 4334.94,3578.86
  region net +5V: 4239.76,3827.29 4210.23,3831.74 4210.23,3793.16 4239.76,3807.61
  region net 3.3V: 3957.39,3828.2 3927.86,3792.77 3987.01,3792.77 3981.01,3828.2
  region net 3.3V: 4046.07,3702.22 4046.07,3741.59 3987.01,3790.8 3987.01,3653
  region net +5V: 4379.84,3733.8 4404.45,3743.7 4335.55,3743.7 4360.16,3733.8
  region net +5V: 4207.76,3827.29 4207.76,3807.61 4237.28,3806.27 4237.28,3837.77
  region net +5V: 4302.24,3827.29 4237.28,3837.77 4237.28,3806.27 4302.24,3807.61
  region net 3.3V: 3957.39,3859.72 3981.01,3859.72 4006.6,3895.15 3931.8,3895.15
  region net 3.3V: 4016.81,4086.9 3993.19,4086.9 3989.25,4059.62 4020.75,4059.62
  region net 3.3V: 3993.19,3988.75 4016.81,3988.75 4020.75,4024.18 3989.25,4024.18
  region net IO8: 5701.46,3883.36 5703.01,3873.85 5726.99,3873.85 5708.54,3890.44
  region net MISO: 5760,3899.74 5753.01,3873.85 5776.99,3873.85 5770,3899.74
  region net 3.3V: 5756.52,4111.52 5756.52,4131.2 5726.6,4155.81 5726.6,4086.91
  region net 3.3V: 5673.48,4111.52 5703.4,4086.91 5703.4,4155.81 5673.48,4131.2
  region net 3.3V: 5723.48,4111.52 5753.4,4086.91 5753.4,4155.81 5723.48,4131.2
  region net SCLK: 5810,4064.06 5820,4064.06 5826.99,4089.95 5803.01,4089.95
  region net MOSI: 5860,4064.06 5870,4064.06 5876.99,4089.95 5853.01,4089.95
  region net 3.3V: 5682.24,4111.52 5682.24,4131.2 5652.72,4135.21 5652.72,4103.71
  region net +5V: 4402.09,4110.28 4370.93,4128.25 4348.65,4105.97 4366.62,4074.81
  region net VCC: 4274.91,4054.77 4280.31,4036.9 4319.69,4036.9 4325.09,4054.77
  region net 3.3V: 4200.42,4110.35 4154.3,4111.15 4132.93,4087.53 4166.76,4073.14
  region net IO9: 5395,3896.16 5385,3896.16 5377.6,3869.81 5402.4,3869.81
  region net MISO: 5435,3896.16 5427.6,3869.81 5452.4,3869.81 5445,3896.16
  region net 3.3V: 5499.84,3768.96 5502.4,3806.03 5477.6,3806.03 5480.16,3768.96
  region net 3.3V: 5348.07,4106.04 5377.87,4081.43 5377.87,4150.33 5348.07,4125.72
  region net 3.3V: 5431.93,4106.04 5431.93,4125.72 5402.13,4150.33 5402.13,4081.43
  region net 3.3V: 5398.07,4106.04 5427.87,4081.43 5427.87,4150.33 5398.07,4125.72
  region net SCLK: 5485,4066.9 5495,4066.9 5502.4,4083.99 5477.6,4083.99
  region net MOSI: 5545,4057.64 5552.4,4083.99 5527.6,4083.99 5535,4057.64
  region net 3.3V: 5499.84,3794.14 5480.16,3794.14 5474.13,3764.62 5505.63,3764.62
  region net MOSI: 6175.38,3464.68 6186.15,3505.98 6179.08,3513.05 6137.78,3502.28
  region net 3.3V: 6116.55,3293.49 6079.73,3282.65 6079.73,3251.15 6116.55,3240.31
  region net $1N17723: 3770.34,4116.02 3779.27,4131.02 3747.84,4131.02 3760.34,4116.02
  region net $1N17812: 3640.34,4116.02 3649.27,4131.02 3617.84,4131.02 3630.34,4116.02
  region net $1N17990: 3724.86,4152.03 3712.22,4162.78 3712.22,4131.29 3724.86,4142.03
  region net $1N17723: 3770.34,4113.91 3760.34,4113.91 3749.46,4098.91 3781.22,4098.91
  region net VCC1: 3678.91,4037.24 3710.41,4037.24 3710.54,4064.89 3678.78,4064.89
  region net $1N17812: 3640.34,4113.91 3630.34,4113.91 3619.46,4098.91 3651.22,4098.91
  region net $1N22837: 3372.52,3289.57 3419.76,3273.82 3419.76,3336.81 3372.52,3321.06
  region net VCC1: 3941.81,3379.46 3945.88,3414.89 3914.12,3414.89 3918.19,3379.46
  region net VBUS: 3976.56,3385.36 3996.24,3385.36 4005.2,3414.89 3973.44,3414.89
  region net VBUS: 4003.97,3469.79 3973.44,3448.91 4005.2,3448.91 4026.07,3464.06
  region net $1N23850: 3514.64,3692.53 3479.21,3700.4 3479.21,3661.03 3514.64,3668.9
  region net +5V: 3418.19,3838.2 3418.19,3802.77 3441.81,3802.77 3441.81,3838.2
  region net EN: 3462.4,3754.3 3472.4,3754.3 3479.21,3763.4 3455.59,3763.4
  region net $1N22837: 3349.16,3445.09 3349.16,3413.59 3396.4,3404.65 3396.4,3475.55
  region net EN: 3256.74,3476.56 3267.99,3470.68 3267.99,3499.06 3256.74,3486.56
  region net EN: 3256.74,3476.56 3256.74,3486.56 3242.01,3499.06 3242.01,3470.68
  region net $1N22837: 3329.25,3366.35 3360.75,3366.35 3362.72,3413.59 3327.28,3413.59
  region net +5V: 3499.65,3853.55 3521,3797.35 3521,3852.45 3516.35,3870.25
  region net +5V: 3444.37,3915.05 3420.75,3915.05 3416.81,3879.62 3448.31,3879.62
  region net +5V: 3418.19,3808.75 3441.81,3808.75 3448.31,3844.18 3416.81,3844.18
  region net +5V: 3483.74,3850.09 3483.74,3873.71 3448.31,3879.62 3448.31,3844.18
  region net +5V: 3513.52,3958.79 3532.26,3942.84 3554.53,3965.11 3538.58,3983.85
  region net +5V: 3495.64,3995.91 3472.17,3988.62 3477.89,3964.99 3503.99,3961.47
  region net D+: 4756.98,3851.15 4758.54,3858.36 4751.46,3865.44 4744.25,3863.88
  region net D-: 4796.98,3851.15 4802.97,3862.8 4795.9,3869.87 4784.25,3863.88
  region net IO6: 5108.02,3722.65 5102.03,3711 5109.1,3703.93 5120.75,3709.92
  region net IO5: 5105.33,3594.78 5108.95,3581.94 5118.95,3581.06 5123.28,3593.2
  region net IO4: 4979.25,3374.92 4990.9,3368.93 4997.97,3376 4991.98,3387.65
  region net MISO: 5233.02,3962.65 5227.03,3951 5234.1,3943.93 5245.75,3949.92
  region net MISO: 5430.99,3953.96 5435,3941.49 5445,3941.49 5449.01,3953.96
  region net MISO: 5447.94,3952.89 5460.41,3956.9 5460.41,3966.9 5447.94,3970.91
  region net IO8: 5667.94,3877.89 5680.41,3881.9 5680.41,3891.9 5667.94,3895.91
  region net SCLK: 4761.39,3467.75 4756.33,3457.03 4763.4,3449.95 4774.13,3455.02
  region net SCLK: 4781.32,3457.99 4793.79,3462 4793.79,3472 4781.32,3476.01
  region net SCLK: 5824.01,4069.84 5820,4082.31 5810,4082.31 5805.99,4069.84
  region net SCLK: 5499.01,4074.84 5495,4087.31 5485,4087.31 5480.99,4074.84
  region net SDA: 4964.9,3153.7 4961.45,3166.68 4951.45,3167.9 4947.02,3155.87
  region net SCL: 4979.77,3210.61 4982.95,3197.4 4992.95,3195.67 4997.52,3207.54
  region net TXD: 5330.99,3283.96 5335,3271.49 5345,3271.49 5349.01,3283.96
  region net RXD: 5360.99,3303.96 5365,3291.49 5375,3291.49 5379.01,3303.96
  region net TXD: 4645.54,3962.85 4650,3950.86 4660,3952.18 4663.4,3965.2
  region net RXD: 4596.3,3994.61 4600,3981.85 4610,3981.14 4614.27,3993.35
  region net DTR: 4715.75,4063.88 4708.54,4065.44 4701.46,4058.36 4703.02,4051.15
  region net DTR: 5439.25,3304.92 5450.9,3298.93 5457.97,3306 5451.98,3317.65
  region net 3.3V: 5349.8,4104.25 5366.56,4106.04 5367.82,4125.72 5351.33,4128.2
  region net DTR: 4715.75,4063.88 4708.54,4065.44 4701.46,4058.36 4703.02,4051.15
  region net DTR: 5439.25,3304.92 5450.9,3298.93 5457.97,3306 5451.98,3317.65
  region net RXD: 5360.99,3303.96 5365,3291.49 5375,3291.49 5379.01,3303.96
  region net DTR: 4715.75,4063.88 4708.54,4065.44 4701.46,4058.36 4703.02,4051.15
  region net $1N17901: 3854.24,4154.65 3845,4146.9 3847.17,4136.9 3869.24,4135.92
  region net VCC1: 3880.58,3304.9 3897.2,3305.09 3897.2,3328.71 3880.58,3328.9
  region net VCC1: 3808.46,4005.65 3782.5,4002.65 3782.5,3971.15 3808.46,3968.15
  region net VCC1: 3843.75,4003.44 3840.75,4029.4 3809.25,4029.4 3806.25,4003.44
  region net $1N17990: 3714.52,4158.99 3697.84,4152.03 3697.76,4142.03 3714.32,4134.99
  region net XTAL2: 5342.25,3712.6 5327.25,3725.1 5327.25,3690.1 5342.25,3702.6
  region net XTAL2: 5260,3655.2 5270,3655.2 5282.5,3670.2 5247.5,3670.2
  region net XTAL1: 5285,3598.6 5275,3598.6 5262.5,3583.6 5297.5,3583.6
  region net XTAL1: 5342.25,3551.2 5327.25,3563.7 5327.25,3528.7 5342.25,3541.2
  region net VCC: 4675.75,3626.15 4722.99,3626.02 4722.99,3657.78 4675.75,3657.65
  region net SDA: 4951.45,3148.35 4961.45,3148.35 4965.3,3161.15 4947.6,3161.15
  region net MOSI: 4919.95,3574.75 4916.1,3552.45 4933.8,3552.45 4929.95,3574.75
  region net SCLK: 4785.3,3462 4807.6,3458.15 4807.6,3475.85 4785.3,3472
  region net MISO: 4898.45,3574.75 4888.45,3574.75 4884.6,3552.45 4902.3,3552.45
  region net IO1: 5087.45,3144.45 5091.3,3161.15 5073.6,3161.15 5077.45,3144.45
  region net IO0: 5055.95,3138.85 5059.8,3161.15 5042.1,3161.15 5045.95,3138.85
  region net IO5: 5108.95,3574.75 5105.1,3552.45 5122.8,3552.45 5118.95,3574.75
  region net IO6: 5087.45,3574.75 5077.45,3574.75 5073.6,3552.45 5091.3,3552.45
  region net IO9: 4982.95,3574.75 4979.1,3552.45 4996.8,3552.45 4992.95,3574.75
  region net XTAL2: 5171.25,3490.85 5158.75,3475.85 5193.75,3475.85 5181.25,3490.85
  region net XTAL1: 5213.6,3440.5 5199.9,3444.35 5199.9,3426.65 5213.6,3430.5
  region net VCC: 4877.2,3440.5 4854.9,3444.35 4854.9,3426.65 4877.2,3430.5
  region net VCC: 5222.2,3409 5199.9,3412.85 5199.9,3395.15 5222.2,3399
  region net VCC: 5222.2,3346 5199.9,3349.85 5199.9,3332.15 5222.2,3336
  region net IO4: 5130.3,3283 5130.3,3273 5152.6,3269.15 5152.6,3286.85
Bottom Layer:
  region net $1N6641: 4155,3391.9 4150,3396.9 4150,3581.9 4160,3591.9 4220,3591.9 4230,3581.9 4230,3396.9 4225,3391.9
  region net +5V: 4360,4141.9 4420.56,4141.9 4435,4127.46 4435,3757.2 4418,3740.2 4356.59,3740.2 4350.59,3746.2 4350.59,4132.49
  region net BAT: 3770,3766.9 3770,3866.9 3740,3896.9 3601.48,3896.9 3597.28,3892.7 3597.28,3792.1 3495,3689.83 3495,3281.9 3505,3271.9 3545,3271.9 3565,3291.9 3565,3636.9 3630,3701.9 3695,3701.9 3715,3721.9 3715,3781.9 3690,3806.9 3690,3843.79 3695.22,3849.01 3732.89,3849.01 3740,3841.9 3740,3766.9 3745,3761.9 3765,3761.9
  region net 3.3V: 4169.45,4063.29 4174.25,4025.38 4205.75,4015.51 4217.33,4048.29
  region net IO5: 6142.22,3902.28 6100.92,3913.05 6093.85,3905.98 6104.62,3864.68
  region net IO6: 6142.22,3802.28 6100.92,3813.05 6093.85,3805.98 6104.62,3764.68
  region net SCLK: 6163.45,3540.31 6200.27,3561.9 6200.27,3571.9 6163.45,3593.49
  region net 3.3V: 6107.5,3281.07 6073.14,3267.65 6087.85,3236.15 6130,3232.89
  region net 3.3V: 6163.45,3240.31 6200.27,3251.15 6200.27,3282.65 6163.45,3293.49
  region net SDA: 6215.45,3171.9 6215.45,3161.9 6230.45,3149.4 6230.45,3184.4
  region net SCL: 6234.74,3257.83 6213.6,3222.57 6216.96,3211.79 6247.95,3215.52
  region net 3.3V: 6230.51,3323.15 6213.34,3296.91 6235.61,3274.64 6261.85,3291.81
  region net 3.3V: 6289.49,3319.45 6306.66,3345.69 6284.39,3367.96 6258.15,3350.79
  region net NTC: 3910,3526.9 3916.81,3538.78 3893.19,3538.78 3900,3526.9
  region net $1N15331: 3860,3526.9 3866.81,3538.78 3843.19,3538.78 3850,3526.9
  region net VCC1: 3766.81,3503.34 3766.81,3538.78 3743.19,3538.78 3743.19,3503.34
  region net BAT: 3766.81,3850.45 3743.19,3850.45 3743.19,3815.02 3766.81,3815.02
  region net $1N17990: 3800,3830.02 3793.19,3815.02 3816.81,3815.02 3810,3830.02
  region net $1N17901: 3850,3830.02 3843.19,3815.02 3866.81,3815.02 3860,3830.02
  region net $1N16926: 3900,3830.02 3893.19,3815.02 3916.81,3815.02 3910,3830.02
  region net NTC: 3920.37,3471.56 3920.37,3481.56 3907.01,3492.44 3907.01,3460.68
  region net VCC1: 3878.19,3365.93 3901.81,3365.93 3907.01,3401.36 3872.99,3401.36
  region net NTC: 3920.37,3471.56 3932.99,3460.68 3932.99,3492.44 3920.37,3481.56
  region net VCC1: 3763.35,3490.99 3746.65,3507.69 3748.31,3494.62 3748.31,3459.18
  region net VCC1: 3744.37,3423.75 3748.31,3459.18 3716.81,3459.18 3720.75,3423.75
  region net VCC1: 3744.37,3455.05 3720.75,3455.05 3716.81,3419.62 3748.31,3419.62
  region net VCC1: 3744.37,3348.75 3748.31,3384.18 3716.81,3384.18 3720.75,3348.75
  region net VCC1: 3952.44,3938.03 3917.01,3942.1 3917.01,3910.34 3952.44,3914.41
  region net $1N16926: 3900,3836.02 3910,3836.02 3917.01,3851.02 3887.5,3851.02
  region net BAT: 3735.12,3888.59 3712.72,3892.53 3712.72,3861.03 3735.12,3864.97
  region net BAT: 3658.02,3888.59 3658.02,3864.97 3677.28,3861.03 3677.28,3892.53
  region net BAT: 3658.02,3888.59 3642.72,3892.53 3642.72,3861.03 3658.02,3864.97
  region net BAT: 3553.62,3326.16 3549.69,3358.87 3510.32,3358.87 3506.38,3326.16
  region net BAT: 3643.96,3781.43 3630,3771.59 3630,3732.22 3643.96,3722.37
  region net BAT: 3690.2,3785.69 3669.83,3822.11 3646.21,3814.56 3633.95,3767.72
  region net D+: 4464.01,3414.84 4460,3427.31 4450,3427.31 4445.99,3414.84
  region net D-: 4494.01,3414.84 4490,3427.31 4480,3427.31 4475.99,3414.84
  region net D+: 4733.5,3848.43 4735,3834.03 4745,3829.45 4749.88,3840.93
  region net D-: 4775.99,3843.96 4780,3831.49 4790,3831.49 4794.01,3843.96
  region net IO6: 5130.13,3728.35 5135.33,3740.16 5123.1,3742.08 5112.34,3731.14
  region net IO5: 5107.06,3610.91 5094.59,3606.9 5094.59,3596.9 5107.06,3592.89
  region net MISO: 5252.94,3952.89 5265.41,3956.9 5265.41,3966.9 5252.94,3970.91
  region net MISO: 5432.06,3970.91 5419.59,3966.9 5419.59,3956.9 5432.06,3952.89
  region net IO8: 5315.97,3877.02 5327.45,3881.9 5322.87,3891.9 5308.47,3893.4
  region net IO8: 5652.06,3895.91 5639.59,3891.9 5639.59,3881.9 5652.06,3877.89
  region net SCLK: 4781.32,3457.99 4793.79,3462 4793.79,3472 4781.32,3476.01
  region net SCLK: 5825.97,4057.02 5837.45,4061.9 5832.87,4071.9 5818.47,4073.4
  region net SCLK: 5482.06,4075.91 5469.59,4071.9 5469.59,4061.9 5482.06,4057.89
  region net SDA: 4954.25,3134.92 4961.46,3133.36 4968.54,3140.44 4966.98,3147.65
  region net SCL: 4989.25,3204.92 5000.9,3198.93 5007.97,3206 5001.98,3217.65
  region net TXD: 5336.53,3303.4 5322.13,3301.9 5317.55,3291.9 5329.03,3287.02
  region net RXD: 5368.81,3323.85 5353.49,3323.91 5346.3,3313.91 5358.29,3309.22
  region net TXD: 4661.37,3962.89 4673.84,3966.9 4673.84,3976.9 4661.37,3980.91
  region net RXD: 4613.78,3992.89 4626.26,3996.9 4626.26,4006.9 4613.78,4010.91
  region net D-: 4494.01,3414.84 4490,3427.31 4480,3427.31 4475.99,3414.84
  region net RXD: 5368.81,3323.85 5353.49,3323.91 5346.3,3313.91 5358.29,3309.22
  region net $1N17901: 3859.42,4163.9 3842.8,4156.9 3842.8,4146.9 3859.42,4139.9
  region net VCC1: 3859.42,3328.9 3842.8,3328.71 3842.8,3305.09 3859.42,3304.9
  region net VCC1: 3880.58,3304.9 3897.2,3305.09 3897.2,3328.71 3880.58,3328.9
  region net VCC1: 3883.88,3308.94 3898.21,3318.41 3881.65,3335.25 3876.16,3331.67
  region net VCC1: 3823.43,3961.95 3843.92,3945.71 3866.19,3967.98 3849.95,3988.47
  region net $1N17990: 3713,4136.32 3720,4119.7 3730,4119.7 3737,4136.32
  region net $1N15331: 3835,3501.9 3825,3501.9 3812.99,3492.78 3847.01,3492.78